# EAGLE board TPS6113X (EAGLE 6.3)
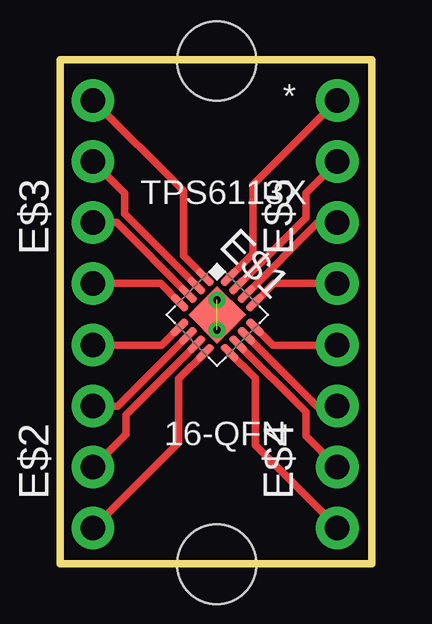
[diagram p0: board, top side]
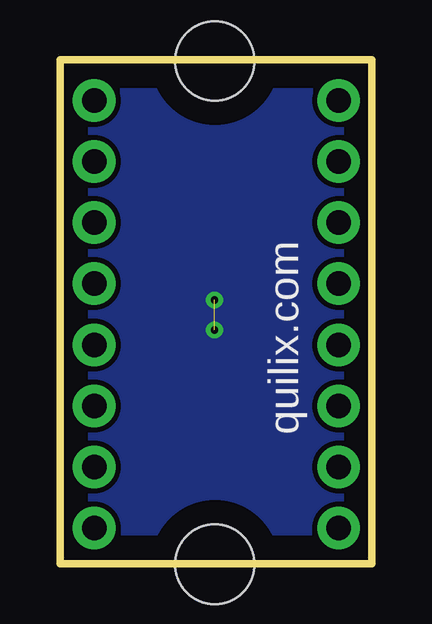
[diagram p1: board, bottom side, seen from below]

Size 13 x 21 mm. Coordinates in mm from the lower left corner, seen from the top.
Outline: 13,0 13,21 0,21 0,0 13,0
Copper layers (1*16): Top 0.035mm / dielectric 1.5mm / Bottom 0.035mm
Design rules "default": minimum track width 10mil, minimum drill 24mil, track to track 8mil, track to pad 8mil, pad to pad 8mil, via to via 8mil, smd to smd 8mil, copper to edge 40mil, drill to drill 8mil, minimum pad ring 10mil, minimum via ring 8mil, stop-mask expansion 4mil, vias tented up to drill 0mil, thermal gap 10mil

## Footprints (pad centres in the part's own frame; a part is rotated, then mirrored left to right if it is on the bottom)
QFN16 = smd 0.85 x 0.3: 1 -1.475,0.75; 2 -1.475,0.25; 3 -1.475,-0.25; 4 -1.475,-0.75; 9 1.475,-0.75; 10 1.475,-0.25; 11 1.475,0.25; 12 1.475,0.75 | smd 0.3 x 0.85: 5 -0.75,-1.475; 6 -0.25,-1.475; 7 0.25,-1.475; 8 0.75,-1.475; 13 0.75,1.475; 14 0.25,1.475; 15 -0.25,1.475; 16 -0.75,1.475 | smd 1.7 x 1.7: TH 0,0
1X04-CLEANBIG = drill 1.016 pad 1.778: 1 -3.81,0; 2 -1.27,0; 3 1.27,0; 4 3.81,0
STAND-OFF = hole 3.302: 0,0

## Placement (x,y rotation side)
E$1  [QFN16]  6.56,10.38 315 top
E$2  [1X04-CLEANBIG]  1.37,5.31 90 top
E$3  [1X04-CLEANBIG]  1.37,15.5 90 top
E$4  [1X04-CLEANBIG]  11.57,5.31 90 top
E$5  [1X04-CLEANBIG]  11.57,15.5 90 top
JP3  STAND-OFF  [STAND-OFF]  6.54,20.96 90 top
JP4  STAND-OFF  [STAND-OFF]  6.54,-0.01 90 top

## Library data of the parts
E$1 = texas
E$2-E$5 = adafruit
JP3 JP4 = SparkFun

## Nets
S$1: E$1.9 E$4.1
S$2: E$1.10 E$4.2
S$3: E$1.11 E$4.3
S$4: E$1.12 E$4.4
S$5: E$1.13 E$5.1
S$6: E$1.14 E$5.2
S$7: E$1.15 E$5.3
S$8: E$1.16 E$5.4
S$9: E$1.1 E$3.4
S$10: E$1.2 E$3.3
S$11: E$1.3 E$3.2
S$12: E$1.4 E$3.1
S$13: E$1.5 E$2.4
S$14: E$1.6 E$2.3
S$15: E$1.7 E$2.2
S$16: E$1.8 E$2.1

## Tracks (layer width: path | path; a pad name or v marks a point on that pad's centre or on a via)
PPAD  (via drill 0.3)  (1 unrouted)
  other vias: 6.55,9.75 6.55,11
  pour Bottom: 12.45,20.6 0.4,20.6 0.4,0.35 12.6,0.35 12.6,20.55
S$1
  Top 0.305: E$1.9 8.15,7.73 8.15,4.95 11.57,1.53 E$4.1
S$2
  Top 0.305: E$1.10 10.25,6.34 10.25,5.35 E$4.2
S$3
  Top 0.305: E$1.11 10.71,6.58 E$4.3
S$4
  Top 0.305: E$1.12 8.88,9.12 E$4.4
S$5
  Top 0.305: E$1.13 8.93,11.69 E$5.1
S$6
  Top 0.305: E$1.14 10.76,14.23 E$5.2
S$7
  Top 0.305: E$1.15 10.25,14.42 10.25,15.45 E$5.3
S$8
  Top 0.305: E$1.16 8.05,12.93 8.05,15.8 E$5.4
S$9
  Top 0.305: E$1.1 5.15,12.85 5.15,15.55 1.39,19.31 E$3.4
S$10
  Top 0.305: E$1.2 2.7,14.59 2.7,15.45 E$3.3
S$11
  Top 0.305: E$1.3 2.36,14.23 E$3.2
S$12
  Top 0.305: E$1.4 4.19,11.69 E$3.1
S$13
  Top 0.305: E$1.5 4.24,9.12 E$2.4
S$14
  Top 0.305: E$1.6 2.41,6.58 E$2.3
S$15
  Top 0.305: E$1.7 2.75,6.22 2.75,5.4 1.39,4.04 E$2.2
S$16
  Top 0.305: E$1.8 4.95,7.71 4.95,5.05 1.4,1.5 E$2.1

## Text on the board
tSilk: *
_tsilk: TPS6113X | 16-QFN
_bsilk: quilix.com